# Altium PCB AM438x_EPOS_EVM_PMconnect.PcbDoc
Units mil, origin at the board's own origin, x right, y up, seen from the top; angles counter-clockwise.
Board outline 5230 x 5600 mil, 2 copper layers (Top Layer, Bottom Layer); 29 components, 54 nets, 118 pads, 4 vias.
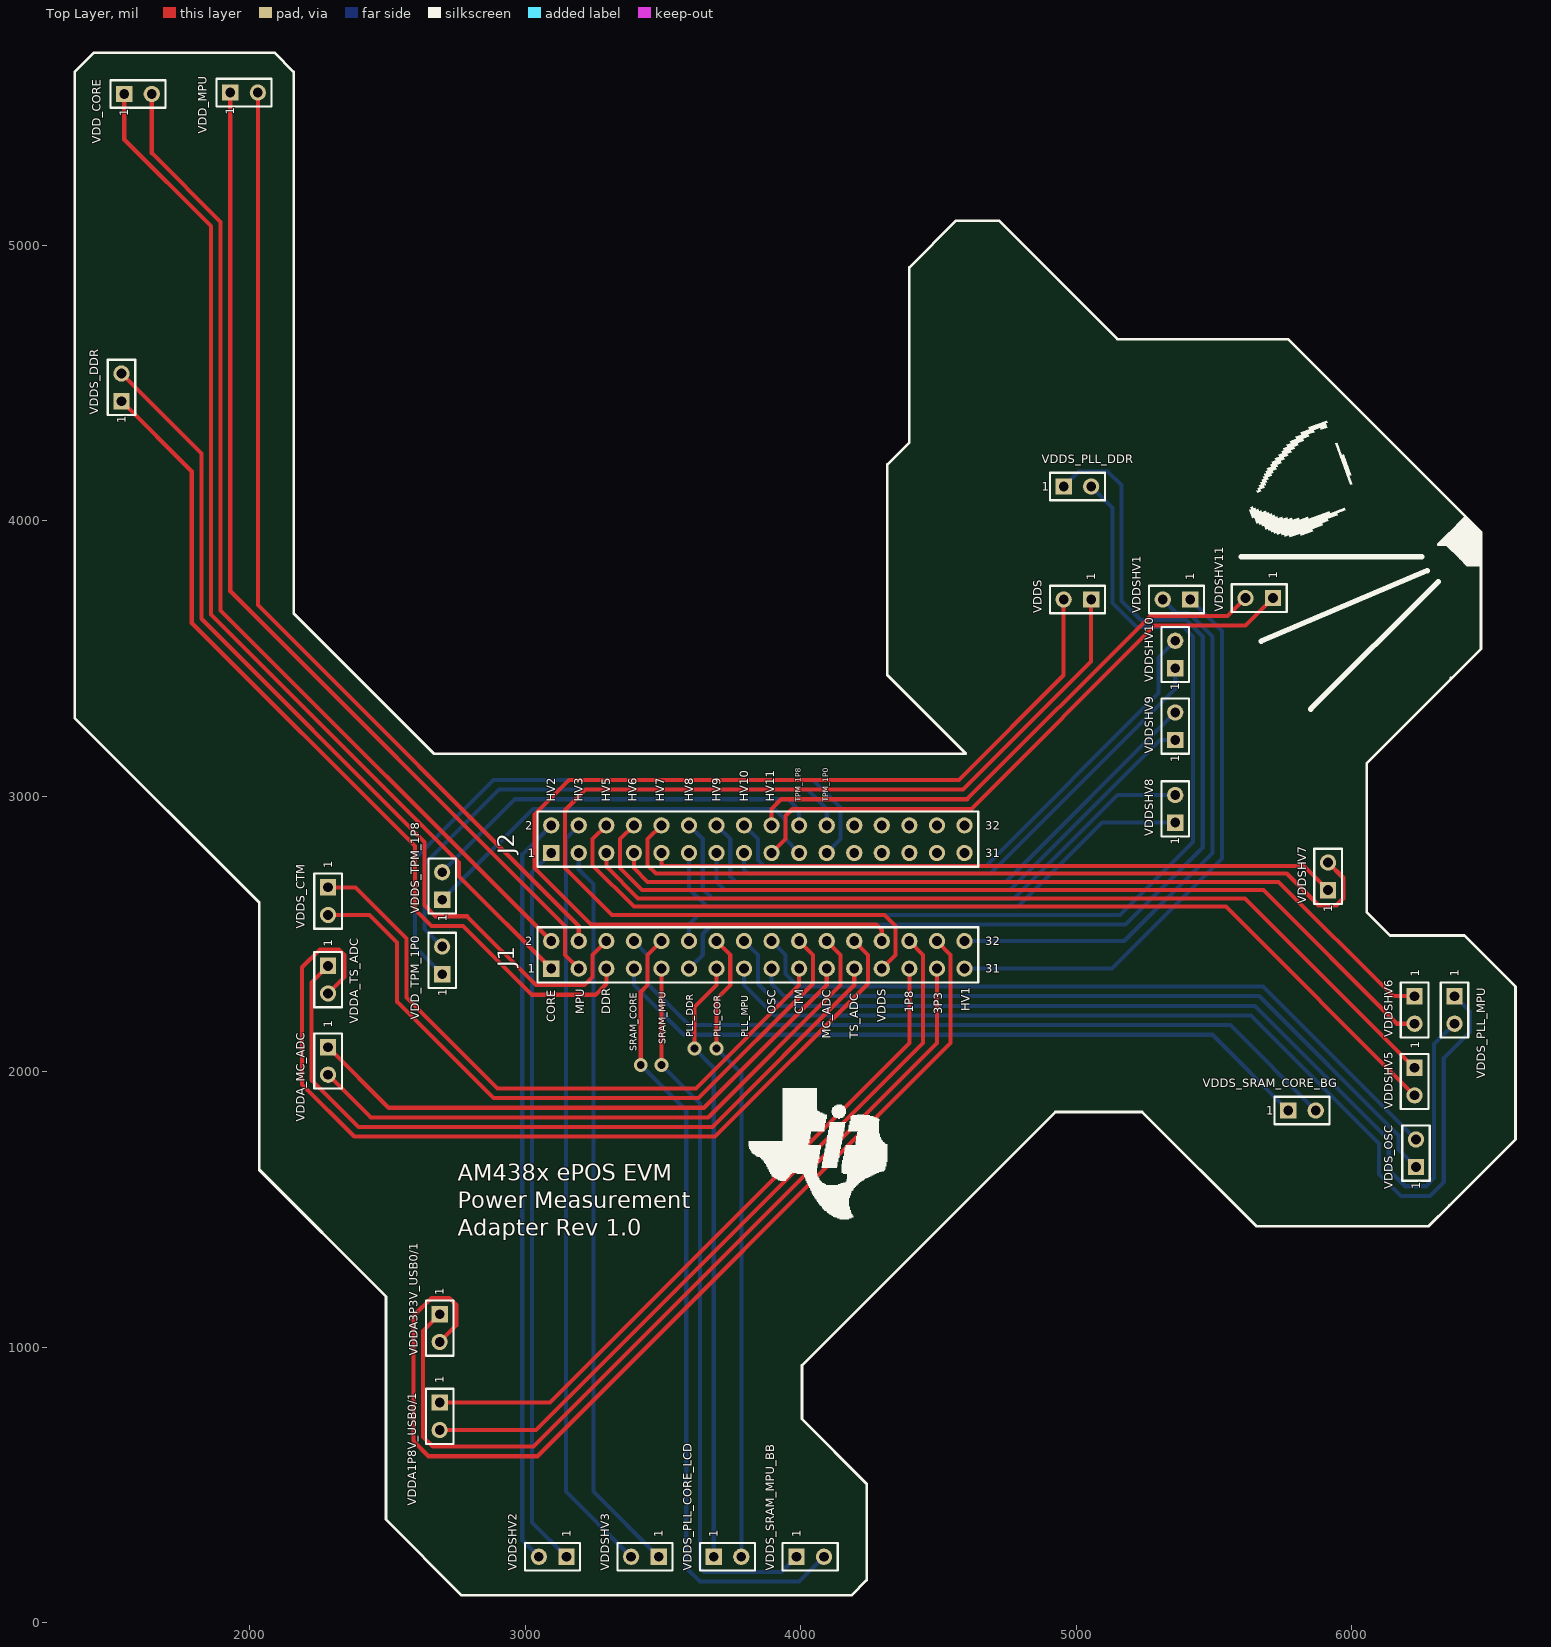
[diagram p0: Top Layer view]
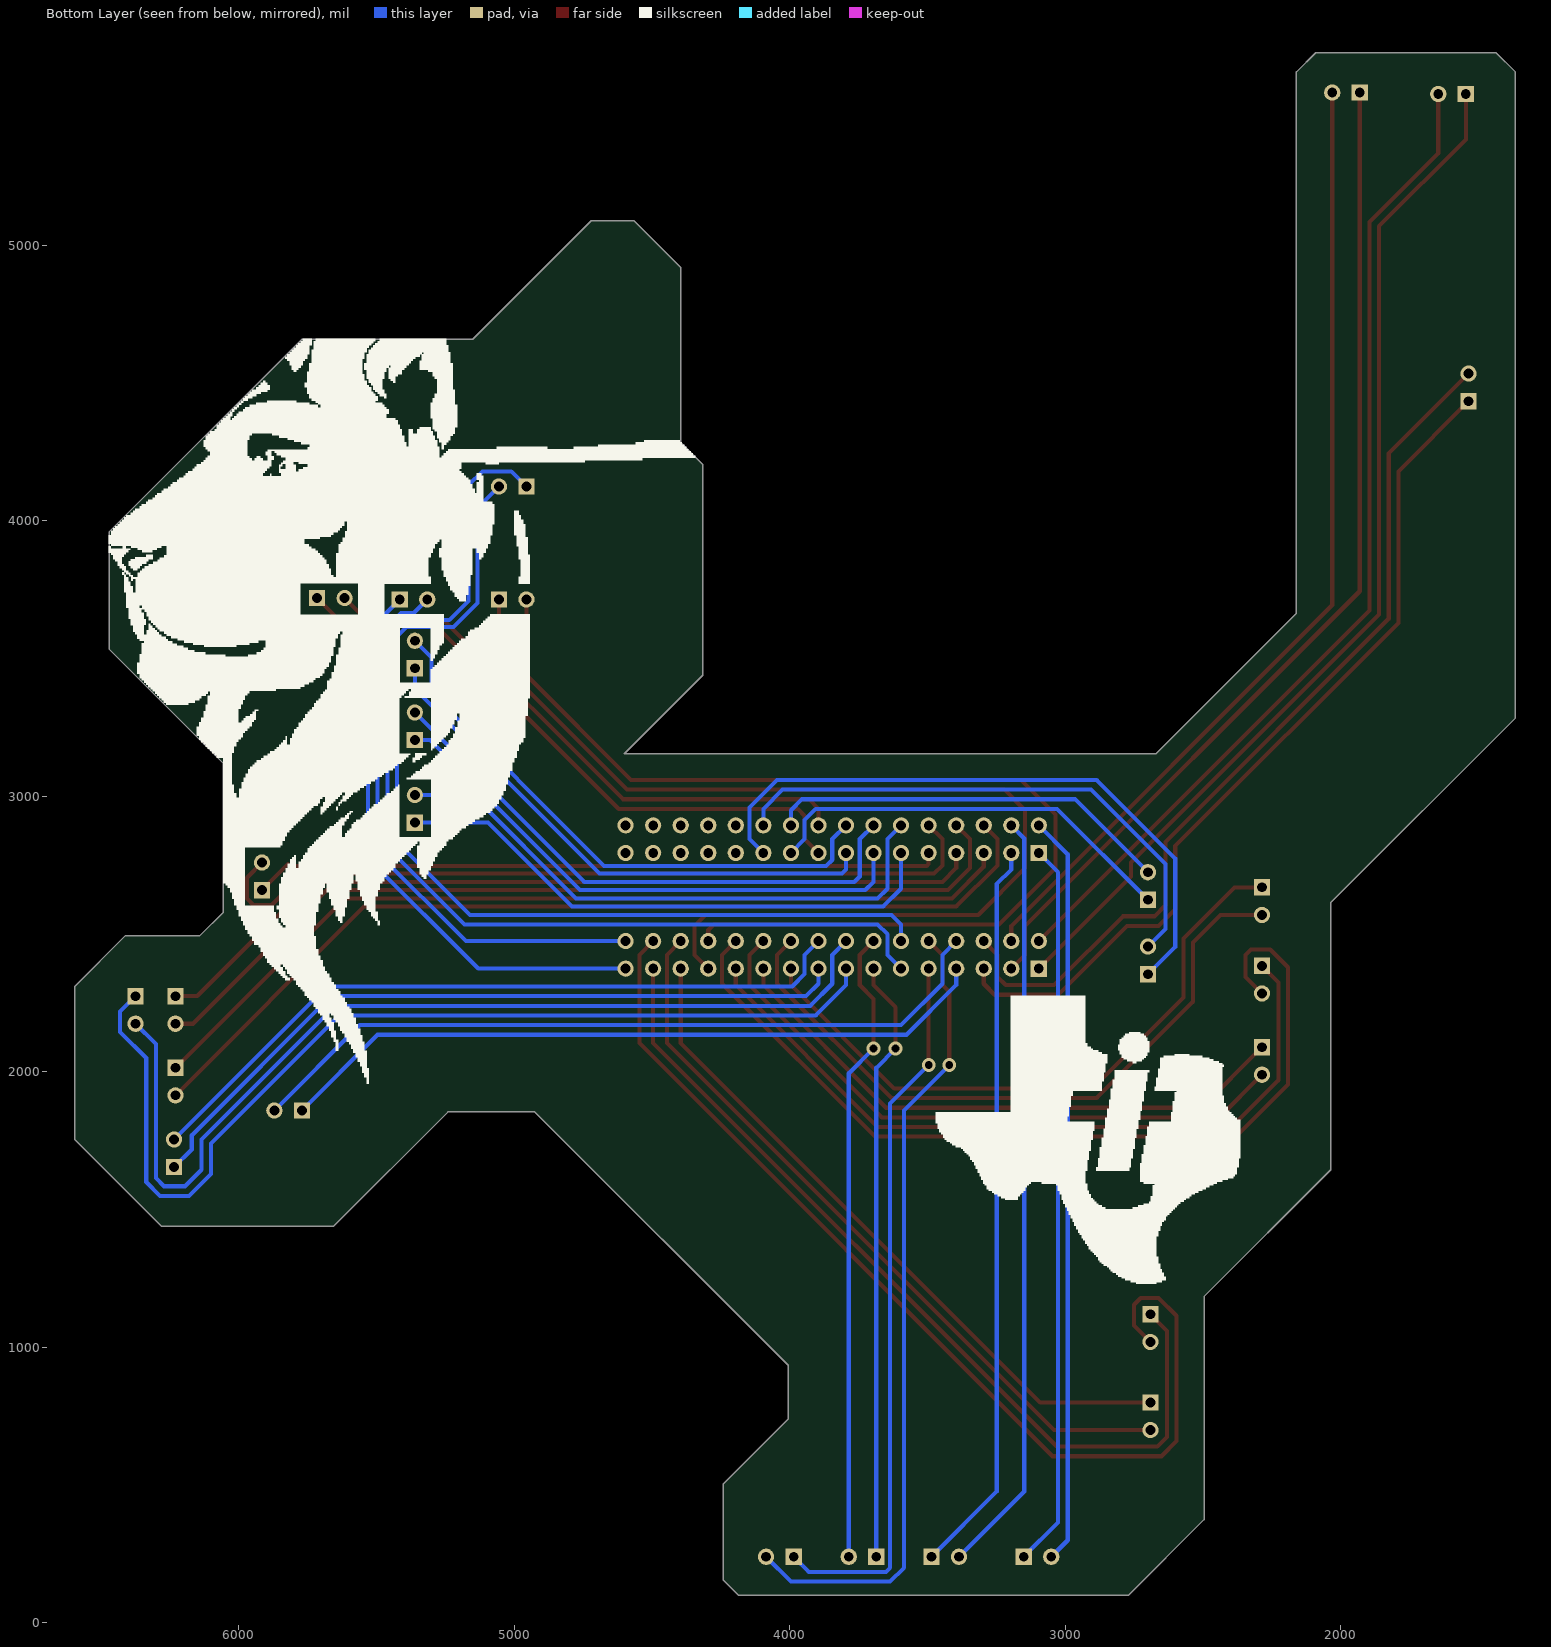
[diagram p1: Bottom Layer view, seen from below]

## Layer stack, top to bottom
Top Layer: signal copper 1.4
Dielectric: dielectric 12.6, FR-4, Dk 4.8
Bottom Layer: signal copper 1.4

## Board outline
1435,5700 2090,5700 2160,5630 2160,3665 2670,3155 4600,3155 4315,3440 4315,4205 4395,4285 4395,4920 4565,5090 4720,5090 5150,4660 5770,4660 6470,3960 6470,3535 6055,3120 6055,2580 6140,2495 6410,2495 6595,2310 6595,1755 6280,1440 5655,1440 5240,1855 4925,1855 4005,935 4005,740 4240,505 4240,155 4185,100 2770,100 2495,375 2495,1185 2035,1645 2035,2615 1365,3285 1365,5630 1435,5700

## Design rules (kind name [scope] priority, off if disabled: settings)
Clearance [All] p1: gap=10
PolygonConnect [All] p1: connectstyle=Relief reliefconductorwidth=10 reliefentries=4 polygonreliefangle="90 Angle"
RoomDefinition AM438x_EPOS_EVM_PMconnect [InComponentClass('AM438x_EPOS_EVM_PMconnect')] p1: confinementstyle=ConfineIn formatcopy=TRUE lockcomponents=FALSE outline -1070,-505 8875,-505 8875,6585 -1070,6585
RoutingVias [All] p1: holewidth=28 width=50 viastyle="Through Hole" minholewidth=28 minwidth=50 maxholewidth=28 maxwidth=50
SilkscreenOverComponentPads [All] p1: minsilkscreentomaskgap=10
SolderMaskExpansion [All] p1: expansion=4
Width [All] p1: maxlimit=15 minlimit=15 preferedwidth=15
27 further rules are at their usual default settings.

## Components (designator, comment, footprint, x,y, rotation, side; value= is the part's Value field where it differs from the comment)
J1 "Header 16X2" HDR2X16 3095,2375 r0 top
J2 "Header 16X2" HDR2X16 3095,2795 r0 top
VDD_CORE "Header 2" HDR1X2 1545,5550 r0 top
VDD_MPU "Header 2" HDR1X2 1930,5555 r0 top
VDD_TPM_1P0 "Header 2" HDR1X2 2699,2355 r90 top
VDDA1P8V_USB0/1 "Header 2" HDR1X2 2690,800 r270 top
VDDA3P3V_USB0/1 "Header 2" HDR1X2 2690,1120 r270 top
VDDA_MC_ADC "Header 2" HDR1X2 2285,2090 r270 top
VDDA_TS_ADC "Header 2" HDR1X2 2285,2385 r270 top
VDDS "Header 2" HDR1X2 5055,3715 r180 top
VDDS_CTM "Header 2" HDR1X2 2285,2670 r270 top
VDDS_DDR "Header 2" HDR1X2 1535,4435 r90 top
VDDS_OSC "Header 2" HDR1X2 6234,1655 r90 top
VDDS_PLL_CORE_LCD "Header 2" HDR1X2 3685,240 r0 top
VDDS_PLL_DDR "Header 2" HDR1X2 4955,4125 r0 top
VDDS_PLL_MPU "Header 2" HDR1X2 6374,2275 r270 top
VDDS_SRAM_CORE_BG "Header 2" HDR1X2 5770,1860 r0 top
VDDS_SRAM_MPU_BB "Header 2" HDR1X2 3985,240 r0 top
VDDS_TPM_1P8 "Header 2" HDR1X2 2699,2625 r90 top
VDDSHV1 "Header 2" HDR1X2 5415,3715 r180 top
VDDSHV2 "Header 2" HDR1X2 3150,240 r180 top
VDDSHV3 "Header 2" HDR1X2 3485,240 r180 top
VDDSHV5 "Header 2" HDR1X2 6229,2015 r270 top
VDDSHV6 "Header 2" HDR1X2 6229,2275 r270 top
VDDSHV7 "Header 2" HDR1X2 5915,2660 r90 top
VDDSHV8 "Header 2" HDR1X2 5360,2905 r90 top
VDDSHV9 "Header 2" HDR1X2 5360,3205 r90 top
VDDSHV10 "Header 2" HDR1X2 5360,3465 r90 top
VDDSHV11 "Header 2" HDR1X2 5715,3720 r180 top

## Footprints (in the part's own frame and the unit in brackets; to place one, negate y for a bottom-side part, rotate by r counter-clockwise, add the part's x,y. Pads: shape width x height; smd on the part's side, far side on the other; paste and mask are expansions set on the pad)
HDR1X2 [mm] "Connector; Header; 2 Position"
  rect 1.5x1.5 hole 0.9: 1(0,0)
  round 1.5 hole 0.9: 2(2.54,0)
  silkscreen extent -1.27,-1.27 3.81,1.27
HDR2X16 [mm] "Connector; Header; 16x2 Position"
  rect 1.5x1.5 hole 0.9: 1(0,0)
  round 1.5 hole 0.9: 2(0,2.54) 3(2.54,0) 4(2.54,2.54) 5(5.08,0) 6(5.08,2.54) 7(7.62,0) 8(7.62,2.54) 9(10.16,0) 10(10.16,2.54) 11(12.7,0) 12(12.7,2.54) 13(15.24,0) 14(15.24,2.54) 15(17.78,0) 16(17.78,2.54) 17(20.32,0) 18(20.32,2.54) 19(22.86,0) 20(22.86,2.54) 21(25.4,0) 22(25.4,2.54) 23(27.94,0) 24(27.94,2.54) 25(30.48,0) 26(30.48,2.54) 27(33.02,0) 28(33.02,2.54) 29(35.56,0) 30(35.56,2.54) 31(38.1,0) 32(38.1,2.54)
  silkscreen extent -1.27,-1.27 39.37,3.81

## Part data
J1 J2: "Header, 16-Pin, Dual row"
VDD_CORE VDD_MPU VDD_TPM_1P0 VDDA1P8V_USB0/1 VDDA3P3V_USB0/1 VDDA_MC_ADC VDDA_TS_ADC VDDS VDDS_CTM VDDS_DDR VDDS_OSC VDDS_PLL_CORE_LCD VDDS_PLL_DDR VDDS_PLL_MPU VDDS_SRAM_CORE_BG VDDS_SRAM_MPU_BB VDDS_TPM_1P8 VDDSHV1 VDDSHV2 VDDSHV3 VDDSHV5 VDDSHV6 VDDSHV7 VDDSHV8 VDDSHV9 VDDSHV10 VDDSHV11: "Header, 2-Pin"

## Via types
v1: diameter 50, hole 28, Top Layer to Bottom Layer, 4 vias

## Nets (pads, with @x,y where several pads share a name; then routed paths per layer and width w, separated by ;. In a path a pad name is that pad's centre, name@x,y a point inside that pad or via, vN(x,y) a via of type N, cw(c..) or ccw(c..) an arc to the next point about the centre after c; other vN are vias at no path point)
1P8_N: J1.28 VDDA1P8V_USB0/1.2 | length 2727.7
  Top Layer w15: VDDA1P8V_USB0/1.2 3040,700 4445,2105 4445,2425 J1.28
1P8_P: J1.27 VDDA1P8V_USB0/1.1 | length 2515.5
  Top Layer w15: VDDA1P8V_USB0/1.1 3090,800 4395,2105 J1.27
3P3_N: J1.30 VDDA3P3V_USB0/1.2 | length 3791.9
  Top Layer w15: VDDA3P3V_USB0/1.2 2750,1080 2750,1155 2725,1180 2660,1180 2595,1115 2595,660 2650,605 3045,605 4545,2105 4545,2425 J1.30
3P3_P: J1.29 VDDA3P3V_USB0/1.1 | length 3226.2
  Top Layer w15: VDDA3P3V_USB0/1.1 2630,1060 2630,675 2665,640 3030,640 4495,2105 J1.29
CORE_N: J1.2 VDD_CORE.2 | length 3675.6
  Top Layer w15: VDD_CORE.2 1645,5335 1895,5085 1895,3675 J1.2
CORE_P: J1.1 VDD_CORE.1 | length 3817
  Top Layer w15: VDD_CORE.1 1545,5385 1860,5070 1860,3660 2760,2760 2760,2710 J1.1
CTM_N: J1.20 VDDS_CTM.2 | length 2509
  Top Layer w15: VDDS_CTM.2 2435,2570 2535,2470 2535,2255 2885,1905 3630,1905 4045,2320 4045,2425 J1.20
CTM_P: J1.19 VDDS_CTM.1 | length 2353.7
  Top Layer w15: VDDS_CTM.1 2385,2670 2570,2485 2570,2270 2900,1940 3620,1940 3995,2315 J1.19
DDR_N: J1.6 VDDS_DDR.2 | length 3278.9
  Top Layer w15: VDDS_DDR.2 1825,4245 1825,3645 2635,2835 2635,2605 2675,2565 2790,2565 3040,2315 3215,2315 3245,2345 3245,2425 J1.6
DDR_P: J1.5 VDDS_DDR.1 | length 3181.1
  Top Layer w15: VDDS_DDR.1 1790,4180 1790,3630 2600,2820 2600,2590 2660,2530 2775,2530 3025,2280 3255,2280 3295,2320 J1.5
HV1_N: J1.32 VDDSHV1.2 | length 2053.9
  Bottom Layer w15: J1.32 5175,2475 5495,2795 5495,3580.71 5410.71,3665 5365,3665 VDDSHV1.2
HV1_P: J1.31 VDDSHV1.1 | length 2088.3
  Bottom Layer w15: J1.31 5130,2375 5530,2775 5530,3600 VDDSHV1.1
HV2_N: J2.2 VDDSHV2.2 | length 2723.3
  Bottom Layer w15: VDDSHV2.2 2990,300 2990,2790 J2.2
HV2_P: J2.1 VDDSHV2.1 | length 2635.8
  Bottom Layer w15: J2.1 3025,2725 3025,365 VDDSHV2.1
HV3_N: J2.4 VDDSHV3.2 | length 2772.7
  Bottom Layer w15: J2.4 3147.97,2847.97 3147.97,477.03 VDDSHV3.2
HV3_P: J2.3 VDDSHV3.1 | length 2675.1
  Bottom Layer w15: J2.3 3195,2735 3247.97,2682.03 3247.97,477.03 VDDSHV3.1
HV5_N: J2.6 VDDSHV5.2 | length 3495.6
  Top Layer w15: J2.6 3245,2845 3245,2750 3395,2600 5544,2600 VDDSHV5.2
HV5_P: J2.5 VDDSHV5.1 | length 3286.4
  Top Layer w15: J2.5 3295,2745 3410,2630 5614,2630 VDDSHV5.1
HV6_N: J2.8 VDDSHV6.2 | length 3293.7
  Top Layer w15: J2.8 3345,2845 3345,2740 3425,2660 5680,2660 6165,2175 VDDSHV6.2
HV6_P: J2.7 VDDSHV6.1 | length 3081.6
  Top Layer w15: J2.7 3395,2740 3445,2690 5735,2690 6150,2275 VDDSHV6.1
HV7_N: J2.10 VDDSHV7.2 | length 2913.9
  Top Layer w15: J2.10 3445,2845 3445,2750 3475,2720 5765,2720 5880,2605 5945,2605 5970,2630 5970,2705 VDDSHV7.2
HV7_P: J2.9 VDDSHV7.1 | length 2505.2
  Top Layer w15: J2.9 3495,2755 3502.03,2747.97 5812.97,2747.97 5820,2755 VDDSHV7.1
HV8_N: J2.12 VDDSHV8.2 | length 2135.5
  Bottom Layer w15: J2.12 3645,2845 3645,2665 3680,2630 4775,2630 5150,3005 VDDSHV8.2
HV8_P: J2.11 VDDSHV8.1 | length 2048.3
  Bottom Layer w15: J2.11 3595,2665 3660,2600 4790,2600 5095,2905 VDDSHV8.1
HV9_N: J2.14 VDDSHV9.2 | length 2083.7
  Bottom Layer w15: J2.14 3745,2845 3745,2710 3765,2690 4745,2690 VDDSHV9.2
HV9_P: J2.13 VDDSHV9.1 | length 2008.2
  Bottom Layer w15: J2.13 3695,2690 3725,2660 4760,2660 5305,3205 VDDSHV9.1
HV10_N: J2.16 VDDSHV10.2 | length 2084.4
  Bottom Layer w15: J2.16 3845,2845 3845,2770 3867.03,2747.97 4672.97,2747.97 5300,3375 5300,3505 VDDSHV10.2
HV10_P: J2.15 VDDSHV10.1 | length 1983.7
  Bottom Layer w15: J2.15 3795,2735 3810,2720 4690,2720 5360,3390 VDDSHV10.1
HV11_N: J2.18 VDDSHV11.2 | length 2096.9
  Top Layer w15: J2.18 3895,2955 3930,2990 4605,2990 5270,3655 5550,3655 VDDSHV11.2
HV11_P: J2.17 VDDSHV11.1 | length 2252.9
  Top Layer w15: J2.17 3945,2845 3945,2930 3970,2955 4620,2955 5285,3620 5615,3620 VDDSHV11.1
MC_ADC_N: J1.22 VDDA_MC_ADC.2 | length 2303.7
  Top Layer w15: VDDA_MC_ADC.2 2440,1835 3665,1835 4145,2315 4145,2425 J1.22
MC_ADC_P: J1.21 VDDA_MC_ADC.1 | length 2145.5
  Top Layer w15: VDDA_MC_ADC.1 2505,1870 3650,1870 4095,2315 J1.21
MPU_N: J1.4 VDD_MPU.2 | length 3562.6
  Top Layer w15: VDD_MPU.2 2030,3695 3195,2530 J1.4
MPU_P: J1.3 VDD_MPU.1 | length 3704
  Top Layer w15: VDD_MPU.1 1930,3745 3145,2530 3145,2425 J1.3
OSC_N: J1.18 VDDS_OSC.2 | length 2678.2
  Bottom Layer w15: J1.18 3945,2425 3945,2355 3990,2310 5679,2310 VDDS_OSC.2
OSC_P: J1.17 VDDS_OSC.1 | length 2699.3
  Bottom Layer w15: J1.17 3895,2320 3940,2275 5665,2275 6170,1770 6170,1719 VDDS_OSC.1
PLL_CORE_N: J1.14 VDDS_PLL_CORE_LCD.2 | length 2313.7
  Top Layer w15: v1(3695,2085) 3695,2265 3745,2315 3745,2425 J1.14
  Bottom Layer w15: v1(3695,2085) 3785,1995 VDDS_PLL_CORE_LCD.2
PLL_CORE_P: J1.13 VDDS_PLL_CORE_LCD.1 | length 2197.1
  Top Layer w15: v1(3615,2085) 3615,2235 3695,2315 J1.13
  Bottom Layer w15: v1(3615,2085) 3685,2015 VDDS_PLL_CORE_LCD.1
PLL_DDR_N: J1.12 VDDS_PLL_DDR.2 | length 3557.1
  Bottom Layer w15: J1.12 3595,2535 3630,2570 5160,2570 5425,2835 5425,3580 5390,3615 5220,3615 5132.5,3702.5 5132.5,4047.5 VDDS_PLL_DDR.2
PLL_DDR_P: J1.11 VDDS_PLL_DDR.1 | length 3878.7
  Bottom Layer w15: J1.11 3645,2425 3645,2500 3680,2535 5180,2535 5460,2815 5460,3580.36 5400.36,3640 5235,3640 5165,3710 5165,4130 5115,4180 5010,4180 VDDS_PLL_DDR.1
PLL_MPU_N: J1.16 VDDS_PLL_MPU.2 | length 3602.7
  Bottom Layer w15: J1.16 3845,2425 3845,2320 3925,2240 5650,2240 6135,1755 6135,1645 6195,1585 6270,1585 6300,1615 6300,2101 VDDS_PLL_MPU.2
PLL_MPU_P: J1.15 VDDS_PLL_MPU.1 | length 3739.6
  Bottom Layer w15: J1.15 3795,2315 3905,2205 5635,2205 6100,1740 6100,1630 6180,1550 6285,1550 6335,1600 6335,2050 6430,2145 6430,2219 VDDS_PLL_MPU.1
SRAM_CORE_N: J1.8 VDDS_SRAM_CORE_BG.2 | length 2791.2
  Bottom Layer w15: J1.8 3445,2425 3445,2320 3595,2170 5560,2170 VDDS_SRAM_CORE_BG.2
SRAM_CORE_P: J1.7 VDDS_SRAM_CORE_BG.1 | length 2623.5
  Bottom Layer w15: J1.7 3395,2315 3575,2135 5495,2135 VDDS_SRAM_CORE_BG.1
SRAM_MPU_N: J1.10 VDDS_SRAM_MPU_BB.2 | length 2932.4
  Top Layer w15: v1(3420,2025) 3420,2290 3445,2315 3445,2425 J1.10
  Bottom Layer w15: v1(3420,2025) 3585,1860 3585,200 3635,150 3995,150 VDDS_SRAM_MPU_BB.2
SRAM_MPU_P: J1.9 VDDS_SRAM_MPU_BB.1 | length 2612
  Top Layer w15: v1(3495,2025) J1.9
  Bottom Layer w15: v1(3495,2025) 3635,1885 3635,200 3650,185 3930,185 VDDS_SRAM_MPU_BB.1
TS_ADC_N: J1.24 VDDA_TS_ADC.2 | length 3319.4
  Top Layer w15: VDDA_TS_ADC.2 2345,2345 2345,2425 2325,2445 2255,2445 2190,2380 2190,1955 2380,1765 3690,1765 4245,2320 4245,2425 J1.24
TS_ADC_P: J1.23 VDDA_TS_ADC.1 | length 2753.6
  Top Layer w15: VDDA_TS_ADC.1 2225,2325 2225,1970 2395,1800 3680,1800 4195,2315 J1.23
VDD_TPM_1P0_N: J2.22 VDD_TPM_1P0.2 | length 1987.3
  Bottom Layer w15: VDD_TPM_1P0.2 2635,2519 2635,2755 2905,3025 4025,3025 4095,2955 J2.22
VDD_TPM_1P0_P: J2.21 VDD_TPM_1P0.1 | length 2351.2
  Bottom Layer w15: VDD_TPM_1P0.1 2600,2454 2600,2775 2885,3060 4045,3060 4145,2960 4145,2845 J2.21
VDDS_N: J1.26 VDDS.2 | length 3992.4
  Top Layer w15: J1.26 4295,2515 4275,2535 3240,2535 3035,2740 3035,2935 3160,3060 4575,3060 4955,3440 VDDS.2
VDDS_P: J1.25 VDDS.1 | length 4031.4
  Top Layer w15: J1.25 4345,2425 4345,2530 4305,2570 3315,2570 3145,2740 3145,2950 3220,3025 4590,3025 5055,3490 VDDS.1
VDDS_TPM_1P8_N: J2.20 VDDS_TPM_1P8.2 | length 1477.3
  Bottom Layer w15: VDDS_TPM_1P8.2 2964,2990 3955,2990 3995,2950 J2.20
VDDS_TPM_1P8_P: J2.19 VDDS_TPM_1P8.1 | length 1540
  Bottom Layer w15: VDDS_TPM_1P8.1 3029,2955 3905,2955 3945,2915 3945,2845 J2.19
pads on no net: J2.23 J2.24 J2.25 J2.26 J2.27 J2.28 J2.29 J2.30 J2.31 J2.32

## Silkscreen, mask and mechanical layers (free items; w line width, h text height)
Top Overlay:
  drawing of 64 lines, arcs and shapes, not listed
  text "1" at 1945,5475 h30 r90
  text "1" at 1560,5470 h30 r90
  text "1" at 1550,4355 h30 r90
  text "1" at 4875,4110 h30
  text "1" at 5730,3790 h30 r90
  text "1" at 5070,3785 h30 r90
  text "1" at 5430,3785 h30 r90
  text "1" at 5375,3385 h30 r90
  text "1" at 5375,3125 h30 r90
  text "HV2" at 3110,2980 h30 r90
  text "HV3" at 3210,2980 h30 r90
  text "HV5" at 3310,2980 h30 r90
  text "HV6" at 3405,2980 h30 r90
  text "HV7" at 3505,2980 h30 r90
  text "HV8" at 3610,2980 h30 r90
  text "HV9" at 3710,2980 h30 r90
  text "HV10" at 3810,2980 h30 r90
  text "HV11" at 3905,2980 h30 r90
  text "TPM_1P8" at 4000,2980 h20 r90
  text "TPM_1P0" at 4100,2980 h20 r90
  text "1" at 5375,2825 h30 r90
  text "1" at 2300,2740 h30 r90
  text "1" at 5930,2580 h30 r90
  text "1" at 2715,2545 h30 r90
  text "1" at 2300,2455 h30 r90
  text "1" at 6245,2345 h30 r90
  text "1" at 6390,2345 h30 r90
  text "1" at 2715,2275 h30 r90
  text "HV1" at 4615,2220 h30 r90
  text "1P8" at 4410,2215 h30 r90
  text "MPU" at 3215,2210 h30 r90
  text "DDR" at 3310,2210 h30 r90
  text "OSC" at 3910,2210 h30 r90
  text "CTM" at 4010,2210 h30 r90
  text "3P3" at 4515,2210 h30 r90
  text "CORE" at 3110,2180 h30 r90
  text "VDDS" at 4310,2180 h30 r90
  text "1" at 2300,2160 h30 r90
  text "PLL_DDR" at 3610,2125 h25 r90
  text "PLL_COR" at 3710,2125 h25 r90
  text "PLL_MPU" at 3810,2125 h25 r90
  text "MC_ADC" at 4110,2120 h30 r90
  text "TS_ADC" at 4210,2120 h30 r90
  text "SRAM_MPU" at 3510,2100 h25 r90
  text "1" at 6245,2085 h30 r90
  text "SRAM_CORE" at 3405,2075 h25 r90
  text "1" at 5690,1845 h30
  text "AM438x ePOS EVM" at 2755,1605 h60
  text "1" at 6250,1575 h30 r90
  text "Power Measurement" at 2755,1505 h60
  text "Adapter Rev 1.0" at 2755,1405 h60
  text "1" at 2705,1190 h30 r90
  text "1" at 2705,870 h30 r90
  text "1" at 3165,310 h30 r90
  text "1" at 3500,310 h30 r90
  text "1" at 3700,310 h30 r90
  text "1" at 4000,310 h30 r90
Bottom Overlay:
  drawing of 10 lines, arcs and shapes, not listed

## Text inside footprints (layer, text, board x,y; h text height)
J1: Top Overlay "2" at 3000,2460 h30; Top Overlay "1" at 3010,2360 h30; Top Overlay "31" at 4670,2360 h30; Top Overlay "32" at 4670,2460 h30
J2: Top Overlay "2" at 3000,2880 h30; Top Overlay "1" at 3010,2780 h30; Top Overlay "31" at 4670,2780 h30; Top Overlay "32" at 4670,2880 h30